# EAGLE board can-ft_DnwC2X1m48 (EAGLE 9.6.2)
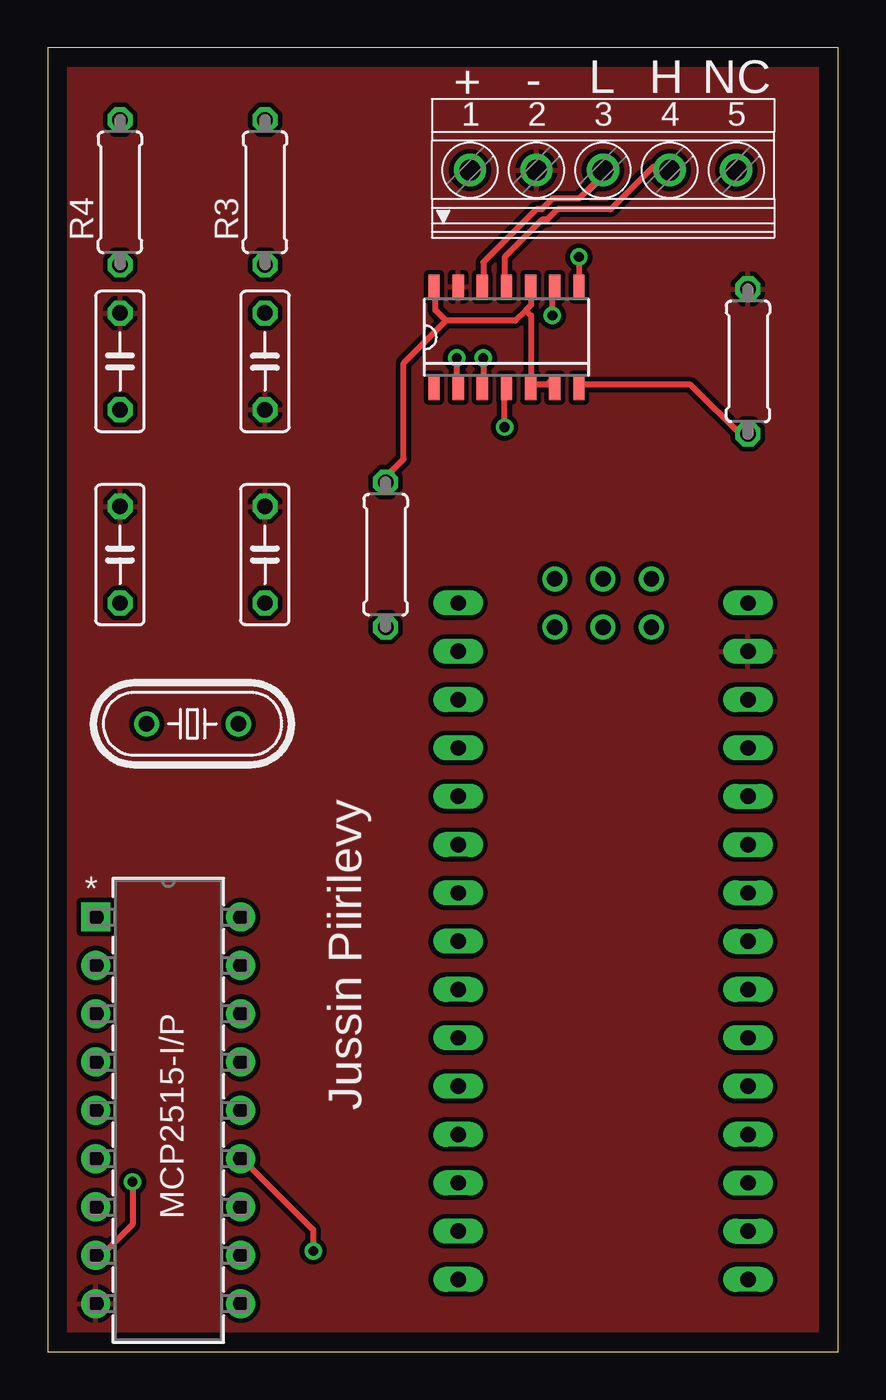
[diagram p0: board, top side]
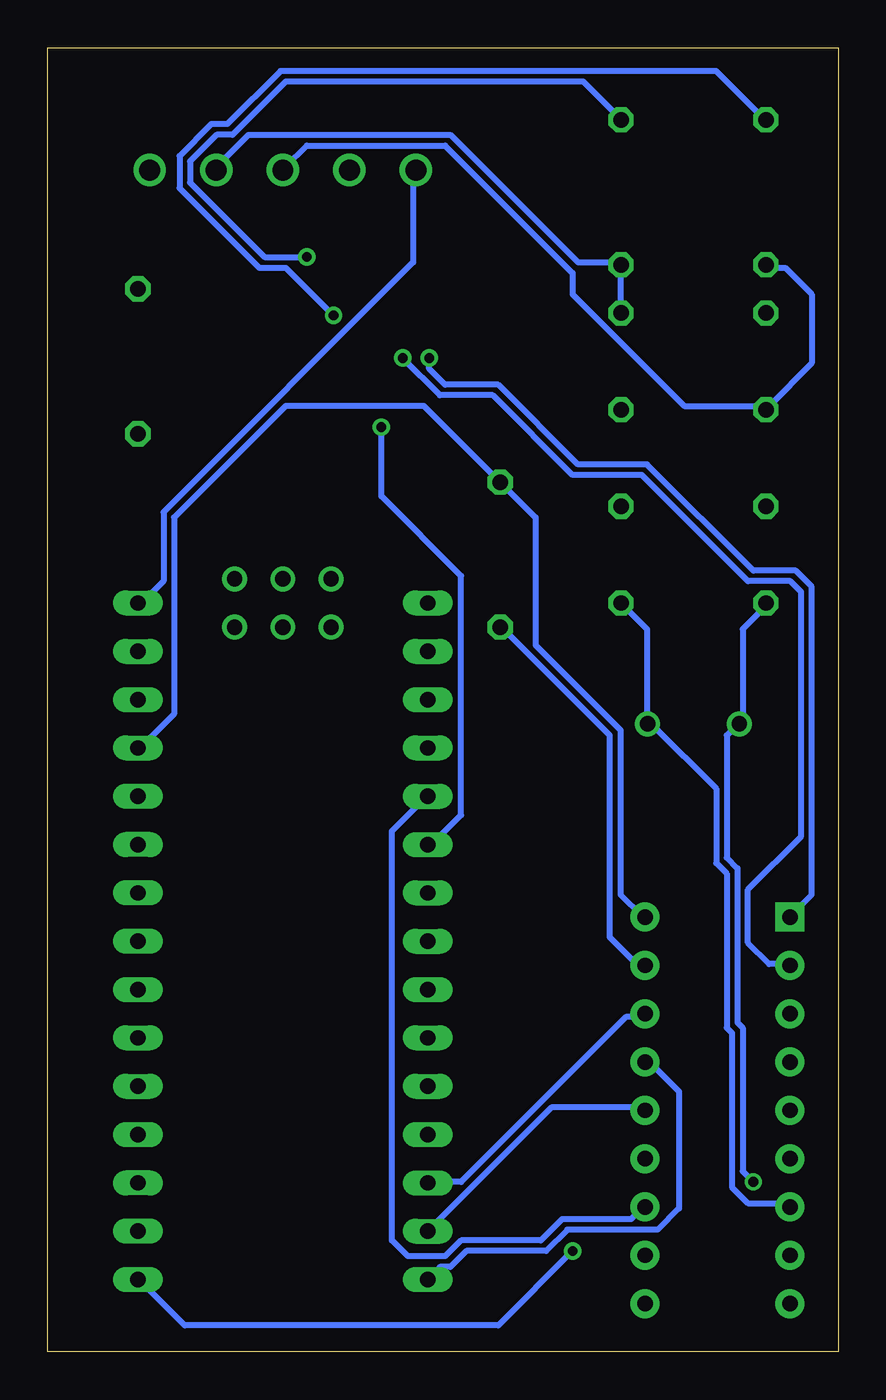
[diagram p1: board, bottom side, seen from below]

Size 41.58 x 68.57 mm. Coordinates in mm from the lower left corner, seen from the top.
Outline: 0,0 41.58,0 41.58,68.57 0,68.57 0,0
Copper layers (1*16): Top 0.035mm / dielectric 1.5mm / Bottom 0.035mm
Design rules "default": minimum track width 6mil, minimum drill 0.35mm, track to track 6mil, track to pad 6mil, pad to pad 6mil, via to via 6mil, smd to smd 6mil, copper to edge 40mil, drill to drill 6mil, minimum pad ring 10mil, minimum via ring 8mil, stop-mask expansion 4mil, vias tented up to drill 0mil, thermal gap 10mil
Net classes: 0 default: width 0.305 mm, drill 0.508 mm, clearance 0.254 mm

## Footprints (pad centres in the part's own frame; a part is rotated, then mirrored left to right if it is on the bottom)
C050-025X075 = drill 0.813 octagon: 1 -2.54,0; 2 2.54,0
HC49/S = drill 0.813: 1 -2.413,0; 2 2.413,0
0207/7 = drill 0.813 octagon: 1 -3.81,0; 2 3.81,0
PDIP18_300MC_MCH = drill 0.813 pad 1.524 square: 1 0,0 | drill 0.813 pad 1.524: 2 0,-2.54; 3 0,-5.08; 4 0,-7.62; 5 0,-10.16; 6 0,-12.7; 7 0,-15.24; 8 0,-17.78; 9 0,-20.32; 10 7.62,-20.32; 11 7.62,-17.78; 12 7.62,-15.24; 13 7.62,-12.7; 14 7.62,-10.16; 15 7.62,-7.62; 16 7.62,-5.08; 17 7.62,-2.54; 18 7.62,0
SOT108-1 = smd 0.6 x 1.3: 1 -3.81,-2.65; 2 -2.54,-2.65; 3 -1.27,-2.65; 4 0,-2.65; 5 1.27,-2.65; 6 2.54,-2.65; 7 3.81,-2.65; 8 3.81,2.65; 9 2.54,2.65; 10 1.27,2.65; 11 0,2.65; 12 -1.27,2.65; 13 -2.54,2.65; 14 -3.81,2.65
NANO = drill 0.8 long: 3.3V -10.16,24.13; 5V -10.16,-1.27; A0 -10.16,19.05; A1 -10.16,16.51; A2 -10.16,13.97; A3 -10.16,11.43; A4 -10.16,8.89; A5 -10.16,6.35; A6 -10.16,3.81; A7 -10.16,1.27; AREF -10.16,21.59; D2 5.08,1.27; D3 5.08,3.81; D4 5.08,6.35; D5 5.08,8.89; D6 5.08,11.43; D7 5.08,13.97; D8 5.08,16.51; D9 5.08,19.05; D10 5.08,21.59; D11 5.08,24.13; D12 5.08,26.67; D13 -10.16,26.67; GND -10.16,-6.35; GND1 5.08,-1.27; RAW -10.16,-8.89; RST -10.16,-3.81; RST1 5.08,-3.81; RX1 5.08,-6.35; TX0 5.08,-8.89 | drill 0.8: ICSP1 -5.08,-10.16; ICSP2 -5.08,-7.62; ICSP3 -2.54,-10.16; ICSP4 -2.54,-7.62; ICSP5 0,-10.16; ICSP6 0,-7.62
1751277 = drill 1.1 pad 1.7: 1 -7,-0.1; 2 -3.5,-0.1; 3 0,-0.1; 4 3.5,-0.1; 5 7,-0.1

## Placement (x,y rotation side)
C1  150pF  [C050-025X075]  11.43,52.07 270 top
C2  150pF  [C050-025X075]  3.81,52.07 90 top
C3  18pF  [C050-025X075]  3.81,41.91 90 top
C4  18pF  [C050-025X075]  11.43,41.91 90 top
Q1  16MHz  [HC49/S]  7.62,33.02 0 top
R1  1k  [0207/7]  36.83,52.07 90 top
R2  10k  [0207/7]  17.78,41.91 90 top
R3  [0207/7]  11.43,60.96 90 top
R4  [0207/7]  3.81,60.96 90 top
U1  MCP2515-I/P  [PDIP18_300MC_MCH]  2.54,22.86 0 top
U2  TJA1055T  [SOT108-1]  24.13,53.34 0 top
U$1  NANO  [NANO]  26.67,30.48 180 top
X1  1751277  [1751277]  29.21,62.23 0 top

## Library data of the parts
C1-C4 = adafruit
Q1 = crystal; OC_FARNELL: 1667008; OC_NEWARK: unknown
R1-R4 = rcl; SPICEPREFIX: R
U1 = MCP2515; BUILT_BY: EMA_UL_Team; MANUFACTURER_PART_NUMBER: MCP2515-I/P; SOURCELIBRARY: Microchip_2011-04-01; VENDOR: Microchip
U2 = NXP_60_26022015
U$1 = Arduino-clone
X1 = con-phoenix-350; OC_FARNELL: unknown; OC_NEWARK: unknown

## Nets
GND: C1.2 C2.2 C3.2 C4.2 R1.2 U1.9 U2.13 U$1.GND X1.2
N$1: U1.1 U2.2
N$2: U1.2 U2.3
N$3: R3.2 U2.8
N$4: R4.2 U2.9
N$5: C1.1 R3.1 U2.11 X1.4
N$6: C2.1 R4.1 U2.12 X1.3
N$7: U1.15 U$1.D12
N$8: R1.1 U2.7
N$9: U1.14 U$1.D11
N$10: U1.16 U$1.D10
N$11: U1.13 U$1.D13
N$12: U1.12 U$1.D2
N$13: U2.4 U$1.D3
N$14: R2.1 U1.17
N$15: C4.1 Q1.2 U1.7
N$16: C3.1 Q1.1 U1.8
N$17: U$1.RAW X1.1
VDD: R2.2 U1.18 U2.5 U2.6 U2.10 U2.14 U$1.5V

## Tracks (layer width: path | path; a pad name or v marks a point on that pad's centre or on a via)
GND
  pour Top: 0,68.58 0,0 41.91,0 41.91,68.58
N$1  (via drill 0.51)
  Top 0.305: v21.51,52.25 21.51,50.85 U2.2
  Bottom 0.305: v21.51,52.25 21.51,51.69 20.68,50.85 17.88,50.85 13.69,46.66 10.06,46.66 4.47,41.07 2.23,41.07 1.4,40.23 1.4,24.03 2.52,22.91 U1.1
N$2  (via drill 0.51)
  Top 0.305: v22.91,52.25 22.91,50.85 U2.3
  Bottom 0.305: v22.91,52.25 20.95,50.29 18.16,50.29 13.97,46.1 10.34,46.1 4.75,40.51 2.52,40.51 1.96,39.95 1.96,27.1 4.75,24.31 4.75,21.51 3.63,20.4 2.79,20.4 U1.2
N$3  (via drill 0.51)
  Top 0.305: v27.94,57.56 U2.8
  Bottom 0.305: v27.94,57.56 30.18,57.56 34.09,61.47 34.09,62.59 32.69,63.98 31.85,63.98 29.06,66.78 13.41,66.78 11.46,64.82 R3.2
N$4  (via drill 0.51)
  Top 0.305: v26.54,54.48 26.54,55.88 U2.9
  Bottom 0.305: v26.54,54.48 29.06,57 30.45,57 34.65,61.19 34.65,62.87 32.97,64.54 32.13,64.54 29.34,67.33 6.43,67.33 3.91,64.82 R4.2
N$5
  Top 0.305: U2.11 24.03,56.16 24.03,57.56 25.98,59.51 26.26,59.51 26.82,60.07 29.62,60.07 31.85,62.31 32.69,62.31 X1.4
  Bottom 0.305: C1.1 11.46,54.76 11.46,57 R3.1 11.46,57.28 13.69,57.28 20.4,63.98 31.01,63.98 32.69,62.31 X1.4
N$6
  Top 0.305: U2.12 22.91,56.16 22.91,57.28 25.7,60.07 25.98,60.07 26.54,60.63 27.94,60.63 29.34,62.03 X1.3
  Bottom 0.305: R4.1 3.63,57 2.79,57 1.4,55.6 1.4,51.97 3.63,49.73 C2.1 3.91,49.73 8.1,49.73 13.97,55.6 13.97,56.72 20.68,63.42 27.94,63.42 29.06,62.31 X1.3
N$7
  Bottom 0.305: U$1.D12 21.51,3.91 20.95,4.47 20.4,4.47 19.56,5.31 15.37,5.31 14.25,6.43 9.5,6.43 8.38,7.54 8.38,13.69 10.06,15.37 U1.15
N$8
  Top 0.305: U2.7 27.94,50.85 33.81,50.85 36.6,48.06 R1.1
N$9
  Bottom 0.305: U$1.D11 15.09,12.85 10.34,12.85 U1.14
N$10
  Bottom 0.305: U$1.D10 21.51,8.94 19.84,8.94 11.18,17.6 10.34,17.6 U1.16
N$11  (via drill 0.51)
  Top 0.305: v13.97,5.31 13.97,6.43 10.34,10.06 U1.13
  Bottom 0.305: v13.97,5.31 17.88,1.4 34.37,1.4 36.6,3.63 U$1.D13
N$12
  Bottom 0.305: U$1.D2 21.79,29.06 23.47,27.38 23.47,5.87 22.63,5.03 20.68,5.03 19.84,5.87 15.65,5.87 14.53,6.99 10.9,6.99 10.34,7.54 U1.12
N$13  (via drill 0.51)
  Top 0.305: v24.03,48.62 24.03,50.57 U2.4
  Bottom 0.305: v24.03,48.62 24.03,44.98 19.84,40.79 19.84,28.22 21.51,26.54 U$1.D3
N$14
  Bottom 0.305: R2.1 17.6,38 12.01,32.41 12.01,21.79 10.34,20.12 U1.17
N$15
  Bottom 0.305: C4.1 10.06,38 10.06,33.25 Q1.2 9.78,32.97 6.43,29.62 6.43,25.7 5.87,25.15 5.87,17.04 5.59,16.76 5.59,8.66 4.75,7.82 2.79,7.82 U1.7
N$16  (via drill 0.51)
  Top 0.305: v4.47,8.94 4.47,6.71 3.07,5.31 2.79,5.31 U1.8
  Bottom 0.305: C3.1 3.91,39.12 5.03,38 5.03,33.25 Q1.1 5.31,32.97 5.87,32.41 5.87,25.98 5.31,25.43 5.31,17.32 5.03,17.04 5.03,9.5 v4.47,8.94
N$17
  Bottom 0.305: U$1.RAW 36.6,39.4 35.48,40.51 35.48,44.15 22.35,57.28 22.35,62.03 X1.1
VDD
  Top 0.305: 25.43,50.85 26.26,50.85 26.54,51.13 26.82,50.85 U2.6 | 20.95,54.2 20.4,54.76 20.4,55.88 U2.14 | 20.95,54.2 24.59,54.2 25.15,54.76 | 25.15,54.76 25.43,55.04 25.43,55.88 U2.10 | 25.43,50.85 25.43,54.48 25.15,54.76 | 25.43,50.85 U2.5 | 20.95,54.2 18.72,51.97 18.72,46.94 17.6,45.82 R2.2
  Bottom 0.305: U$1.5V 36.6,31.85 34.92,33.53 34.92,43.87 29.06,49.73 21.79,49.73 R2.2 15.93,43.87 15.93,37.16 11.46,32.69 11.46,24.03 10.34,22.91 U1.18

## Text on the board
tPlace: + | - | L | H | NC | Jussin Piirilevy